# Altium PCB Board4_quangnguyen.PcbDoc
Units mm, origin at the board's own origin, x right, y up, seen from the top; angles counter-clockwise.
Board outline 100.12 x 63.02 mm, 2 copper layers (Top Layer, Bottom Layer); 22 components, 9 nets, 53 pads, 0 vias.
Unrouted connection lines stored in the file: 39.
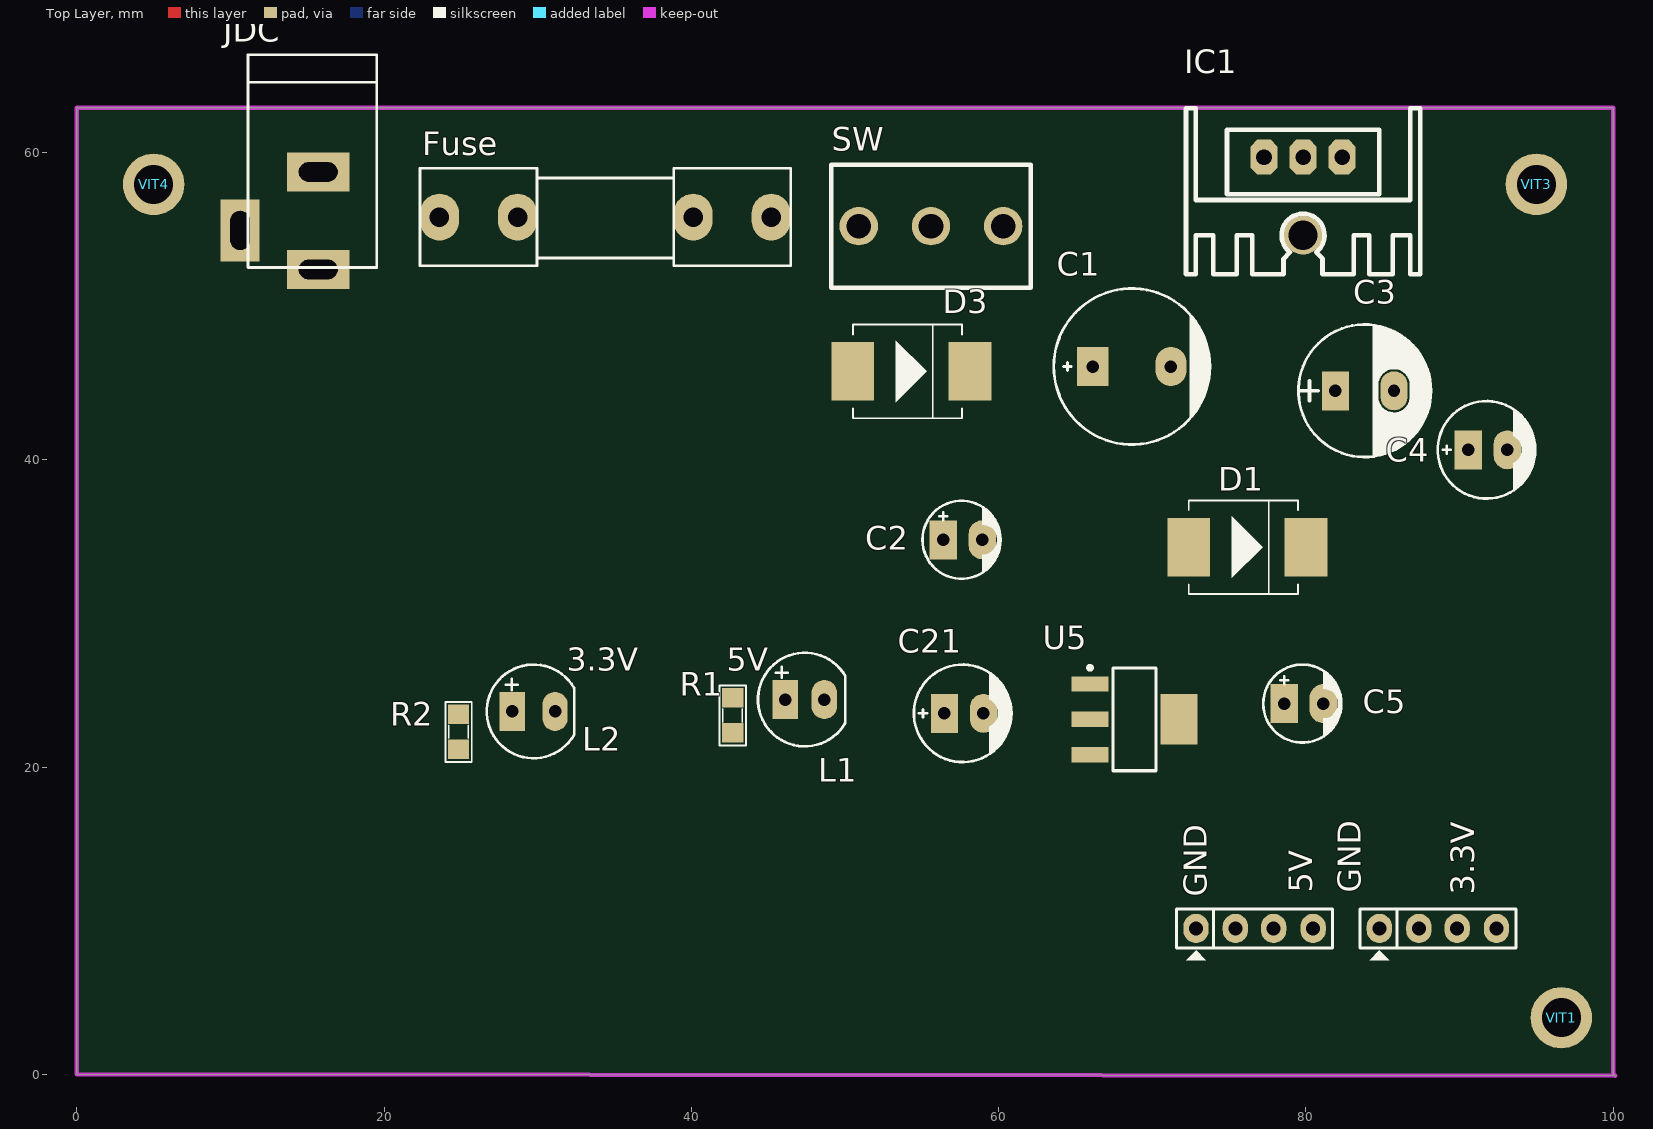
[diagram p0: Top Layer view]
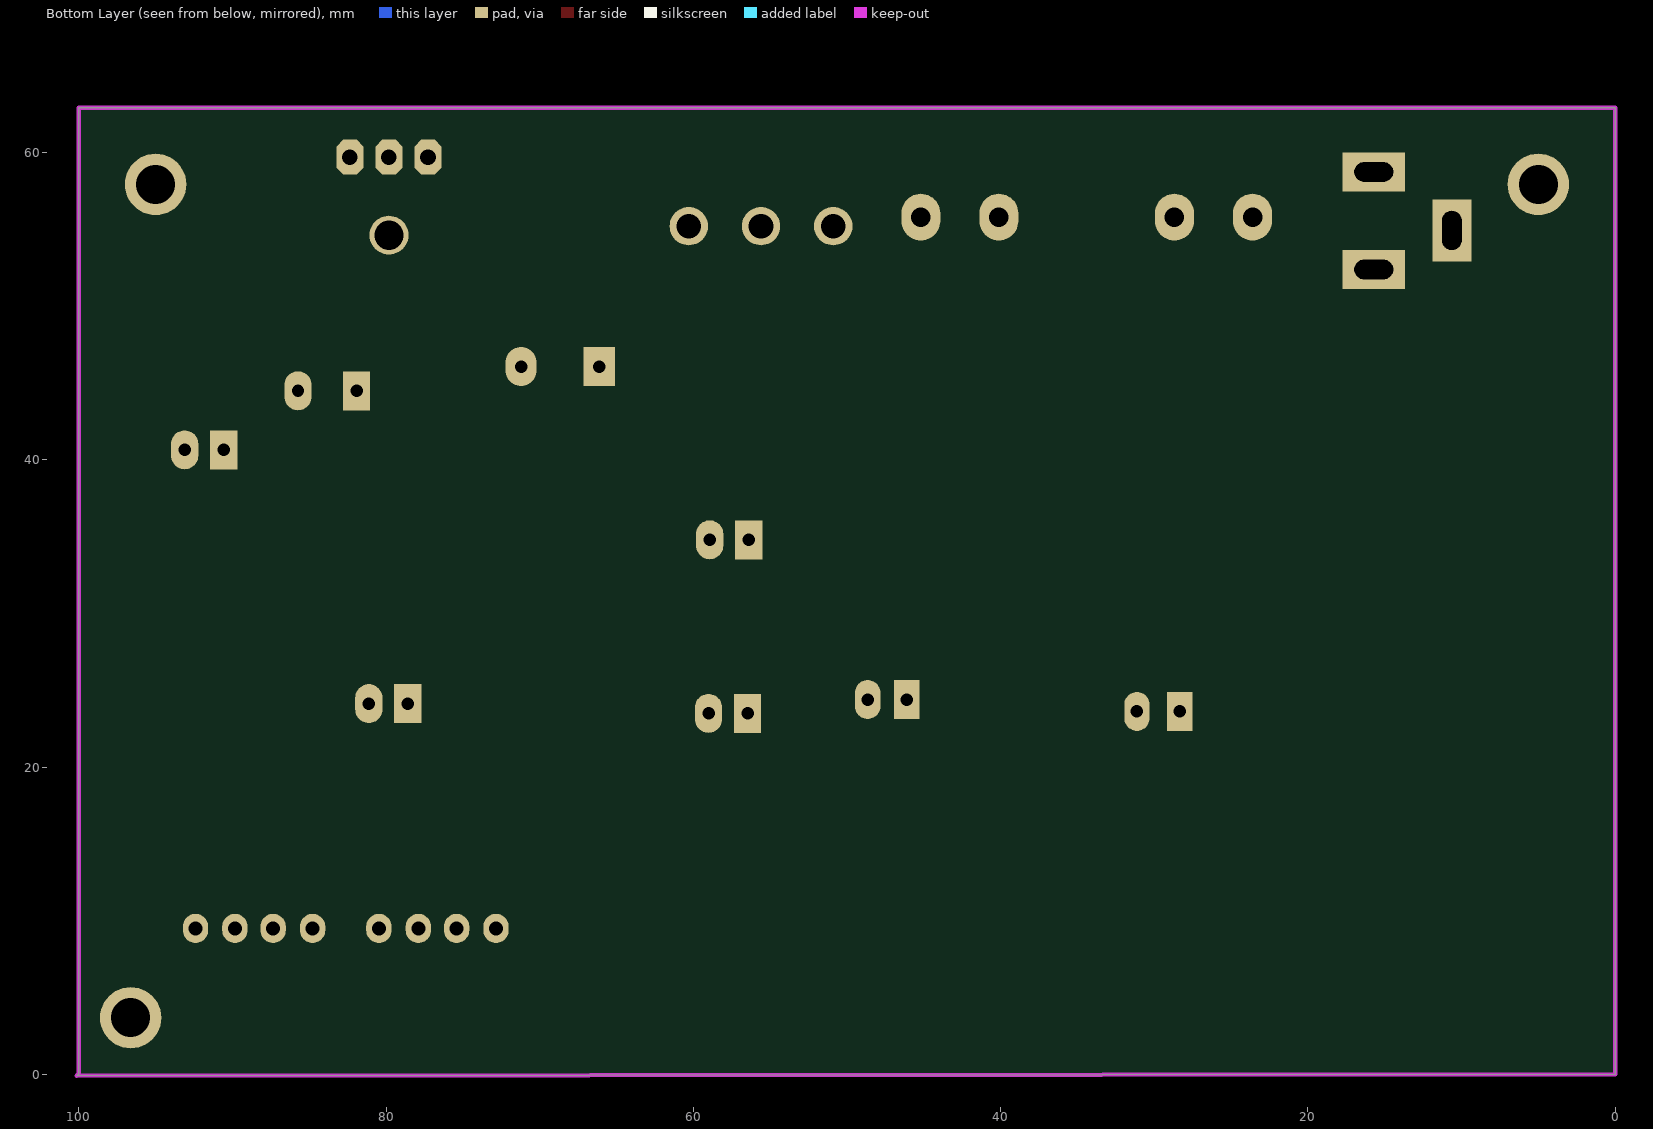
[diagram p1: Bottom Layer view, seen from below]

## Layer stack, top to bottom
Top Solder: solder mask 0.0102, Solder Resist, Dk 3.5
Top Layer: signal copper 0.0356
Dielectric 1: dielectric 0.32, FR-4, Dk 4.8
Bottom Layer: signal copper 0.0356
Bottom Solder: solder mask 0.0102, Solder Resist, Dk 3.5

## Board outline
0,0 0,62.929 100,62.929 100,0.033 100.122,-0.089

## Design rules (kind name [scope] priority, off if disabled: settings)
Clearance [All] p1: gap=0.254 ignorepadtopadclearanceinfootprint=FALSE
PolygonConnect [All] p1: connectstyle=Relief reliefconductorwidth=0.254 reliefentries=4 polygonreliefangle="90 Angle" airgapwidth=0.254
RoutingVias RoutingVias_powerclass [InNetClass('Power_class')] p1: holewidth=0.8 width=1.1 viastyle="Through Hole" minholewidth=0.8 minwidth=1.1 maxholewidth=8 maxwidth=1.1
RoutingVias RoutingVias_signalclass [All] p2: holewidth=0.4 width=0.7 viastyle="Through Hole" minholewidth=0.4 minwidth=0.7 maxholewidth=0.4 maxwidth=0.7
SilkToSilkClearance [IsObjectKind('Text')] p1: silktosilkclearance=0.254
SolderMaskExpansion [All] p1: expansion=0.102
UnRoutedNet [All] p1: checkbadconnections=TRUE
Width Width_powerclass [InNetClass('Power_class')] p1: maxlimit=2 minlimit=0.5 preferedwidth=1
28 further rules are at their usual default settings.

## Components (designator, comment, footprint, x,y, rotation, side; value= is the part's Value field where it differs from the comment)
3.3V "JP4" JP4F 87.891,11.302 r180 top
5V "JP4" JP4F 75.953,11.302 r180 top
C1 "1000uF" CP2/4 66.128,46.074 r0 top value=100uF/16V
C2 "0.33uF" CP1/2 56.395,34.797 r0 top value=0.33uF/16V
C3 "0.1uF" CP1.5/3.4 81.92,44.495 r0 top value=0.1uF/16V
C4 "100uF" CP1/2.5 90.567,40.651 r0 top value=100uF/35V/50V
C5 "10uF" CP1/2 78.58,24.134 r0 top value=10uF/16V
C21 "100uF" CP1/2.5 56.47,23.499 r0 top value=10uF/50V
D1 "1N4007" SM-DIODE 76.08,36.214 r0 top value=1N5007
D3 "1N4007" SM-DIODE 54.212,47.654 r0 top value=1N5007
Fuse "F1.5A" Fuse 34.397,55.799 r0 top value=Fuse
IC1 "LM7805" QTO-220H3 82.351,59.702 r180 top
JDC "Jac DC" DC-IN 13.168,55.563 r270 top
L1 "LED" LED-5-RED 46.108,24.396 r0 top
L2 "LED" LED-5-BLUE 29.725,23.626 r0 top
R1 "Res1" SM-RES-0805 42.679,22.224 r90 top value=1K
R2 "Res1" SM-RES-0805 24.839,21.159 r90 top value=1K
SW "Switch 3x2" SW-GAT 55.593,55.213 r180 top value="Switch 4x2"
U5 "LM1117MP-3.3TR" SOT223-4N 68.841,23.113 r0 top
VIT1 "1" VIT 96.62,3.688 r0 top
VIT3 "3" VIT 95,57.929 r0 top
VIT4 "4" VIT 5,57.929 r0 top

## Footprints (in the part's own frame and the unit in brackets; to place one, negate y for a bottom-side part, rotate by r counter-clockwise, add the part's x,y. Pads: shape width x height; smd on the part's side, far side on the other; paste and mask are expansions set on the pad)
CP1.5/3.4 [mil] "Tu hoa 220->470uF,16V, 470uF/16V,25V"
  rect 70x100 hole 32: 1(0,0)
  oval 70x100 hole 32: 2(150,0)
  silkscreen extent -95,-170 245,170, body extent -85,-157 230,157, height 446
CP1/2 [mil] "Tu hoa < 22uF/16>50V"
  rect 70x100 hole 32: 1(0,0)
  oval 70x100 hole 32: 2(100,0)
  silkscreen extent -53,-100 147,100, body extent -49,-99 149,99, height 287
CP1/2.5 [mil] "Tu hoa 33 >100 uF,50V, 220uF/16V,25V"
  rect 70x100 hole 32: 1(0,0)
  oval 70x100 hole 32: 2(100,0)
  silkscreen extent -78,-125 172,125, body extent -76,-124 172,124, height 422
CP2/4 [mil] "Tu hoa 1000uF/16V/25V"
  rect 80x100 hole 32: 1(0,0)
  oval 80x100 hole 32: 2(200,0)
  silkscreen extent -100,-200 300,200, body extent -91,-197 303,197, height 787
DC-IN [mil] "Jac DC input"
  rect 100x160 hole 50 slot 100 at 90 deg: 1(125,100) 2(-125,100)
  rect 160x100 hole 50 slot 100 at 0 deg: 3(25,-100)
  silkscreen extent -425,-80 120,250, body extent -410,-105 134,269, height 434
Fuse [mil] "De Fuse"
  oval 100x120 hole 50: 1(-425,0) 1(-225,0) 2(225,0) 2(425,0)
  silkscreen extent -475,-125 475,125, body extent -448,-117 459,127, height 378
JP4F [mil] "Jumper 4, female"
  oval 65x75 hole 36: 1(122.44,70.87) 2(21.44,70.87) 3(-76.56,70.87) 4(-177.56,70.87)
  silkscreen extent -228,21 172,152, body extent -228,24 172,124, height 175
LED-5-BLUE [mil] "LED 2 PIN, 5 ly , Only colour, pin to pin 110mil"
  rect 65x100 hole 32: 1(-55,0)
  oval 65x100 hole 32: 2(55,0)
  silkscreen extent -120,-120 104,120, body extent -113,-120 100,117, height 339
LED-5-RED [mil] "LED 2 PIN, 5 ly , Only colour,pin to pin 100mil"
  rect 65x100 hole 32: 1(0,0)
  oval 65x100 hole 32: 2(100,0)
  silkscreen extent -70,-120 154,120, body extent -65,-119 149,118, height 339
QTO-220H3 [mil] "TO-220 1-2-3"
  oct 70x90 hole 40: 1(0,0) 2(100,0) 3(200,0)
  round 100 hole 75: 2(100,200)
  silkscreen extent -200,-125 400,300, body extent -190,-102 392,323, height 984
SM-DIODE [mm] "Magnetic-Core Inductor with Winding Polarity Marking; 2 Leads"
  rect 2.794x3.81 smd: 1(-3.71,-1.9) 2(3.91,-1.9)
  Top Layer region: -0.662,-3.881
  silkscreen extent -3.71,-4.95 3.4,1.15, body extent -2.5,-3.65 2.8,-0.05, height 2.45
SM-RES-0805 [mil]
  rect 50x55 smd: 1(0,0) 2(90,0)
  silkscreen extent -32,-34 121,33, body extent 6,-25 84,25, height 31
SOT223-4N [mm] "SOT223, 4-Leads, Body 6.5x3.5mm, Pitch 2.3mm, Lead Span 7mm, IPC Medium Density"
  rect 2.4x1 smd: 1(-2.9,2.3) 2(-2.9,0) 3(-2.9,-2.3)
  rect 2.4x3.3 smd: 4(2.9,0)
  silkscreen extent -3.02,-3.35 1.4,3.47, body extent -3.39,-3.27 3.5,3.23, height 1.72
SW-GAT [mm]
  round 2.5 hole 1.6 mask+0.1: 1(-4.7,0)
  round 2.5 hole 1.6: 2(0,0) 3(4.7,0)
  silkscreen extent -6.5,-4 6.5,4, body extent -6.5,-3.8 6.7,4.1, height 28.34
VIT [mm] "VIT"
  round 4 hole 2.54: VIT1(0,0)

## Part data
C1 C2 C3 C4 C5: library part CP3, "Cap 100uF/35V - 470uF/16V", Description 1="1000uF/6,3V - 470uF/16V - 330uF - 25V", Description 2="220uF/35V - 100uF/50V - 63V - 4,7uF/200V", Description 3="22uF => 33uF100V - 3,3uF => 4,7uF/250V", Description 4="2,2uF =>3,3uF/350 - 2,2uF/400V - 1uF/450V"
C21: library part CP1, "Cap P  0,1uF < 22uF , 16 - 50V", Description 1="10 => 220uF/6,3V/10V - 10uF => 100uF/16V", Description 2="0,1uF => 33uF/50V - 10uF => 22uF/63V", Description 3="0,47uF => 10uF/100V"
D1 D3: library part Diode, "Default Diode SMD", Code - JEDEC=DO-214-AB, Published=8-Jun-2000, Publisher="Altium Limited", Revision="July-2002: Re-released for DXP Platform."
Fuse: library part Fuse, "Fuse", Designed by=VanDungEvn
IC1: library part LM78xx, "On ap +, from + 5 to + 24VDC", =LM7815
JDC: library part DCIN, "Jac DC input"
L1 L2: "Typical LED", LatestRevisionDate=08-Jul-2005, LatestRevisionNote="Mech Layer 1 removed.", PackageReference=LED-1, Published=8-Jun-2000, Publisher="Altium Limited"
R1 R2: library part Res1_1, "Resistor", Manufacturer="Generic Components", Class=Passive, Published=08/06/2000, Publisher="Altium Hobart Technology Centre", SubClass=Resistor
SW: library part SW3x2
U5: "3.3V 800mA Low-Dropout Linear Regulator", Output Current (max)=800mA, PSpiceTemplate="X^@REFDES %IN %OUT %GND @MODEL", Volt (Max)=20V, ComponentLink1Description="Digikey Part Link", ComponentLink1URL=http://search.digikey.com/scripts/DkSearch/dksus.dll?Detail&name=LM1117MP-3.3TR-ND, ComponentLink2Description="Open Datasheet", ComponentLink2URL=H:\LIBRARY\LIBRARY.Datasheet\LM1117.pdf, Price="4.000 VND", Published=13-April-2009, Publisher="Hoang Nguyen", Vendor=Digikey, V out=3.3V
VIT1 VIT3 VIT4: library part VIT, "Oc Vit"

## Nets (pads, with @x,y where several pads share a name; then routed paths per layer and width w, separated by ;. In a path a pad name is that pad's centre, name@x,y a point inside that pad or via, vN(x,y) a via of type N, cw(c..) or ccw(c..) an arc to the next point about the centre after c; other vN are vias at no path point)
3.3V: 3.3V.2 3.3V.3 3.3V.4 C21.1 R2.1 U5.2
5V: 5V.2 5V.3 5V.4 C3.1 C4.1 C5.1 D1.1 IC1.3 R1.1 U5.3
12V: Fuse.1 JDC.1
GND: 3.3V.1 5V.1 C1.2 C2.2 C3.2 C4.2 C5.2 C21.2 IC1.2 JDC.2 L1.2 L2.2 U5.1
NetC1_1: C1.1 C2.1 D1.2 D3.2 IC1.1
NetD3_1: D3.1 SW.2 SW.3
NetFuse_2: Fuse.2 SW.1
NetL1_1: L1.1 R1.2
NetL2_1: L2.1 R2.2
pads on no net: JDC.3 U5.4 VIT1.VIT1 VIT3.VIT1 VIT4.VIT1

## Keep-outs
Keep-Out Layer:
  the board outline again, w0.3

## Silkscreen, mask and mechanical layers (free items; w line width, h text height)
Top Overlay:
  text "3.3V" at 31.884,26.288 h1.5
  text "5V" at 42.298,26.288 h1.5
  text "GND" at 83.573,11.81 h1.5 r90
  text "GND" at 73.54,11.556 h1.5 r90
Bottom Overlay:
  text "BOARD_04_POWER" at 68.453,-30.924 h2